# Altium PCB PhaseShifter.PcbDoc (part 1 of 2)
Units mil, origin at the board's own origin, x right, y up, seen from the top; angles counter-clockwise.
Board outline 3600.43 x 2703.44 mil, 4 copper layers (Top Layer, Layer 1, Layer 2, Bottom Layer), stack 62.449 mil thick; 81 components, 31 nets, 219 pads, 360 vias.
Unrouted connection lines stored in the file: 58.
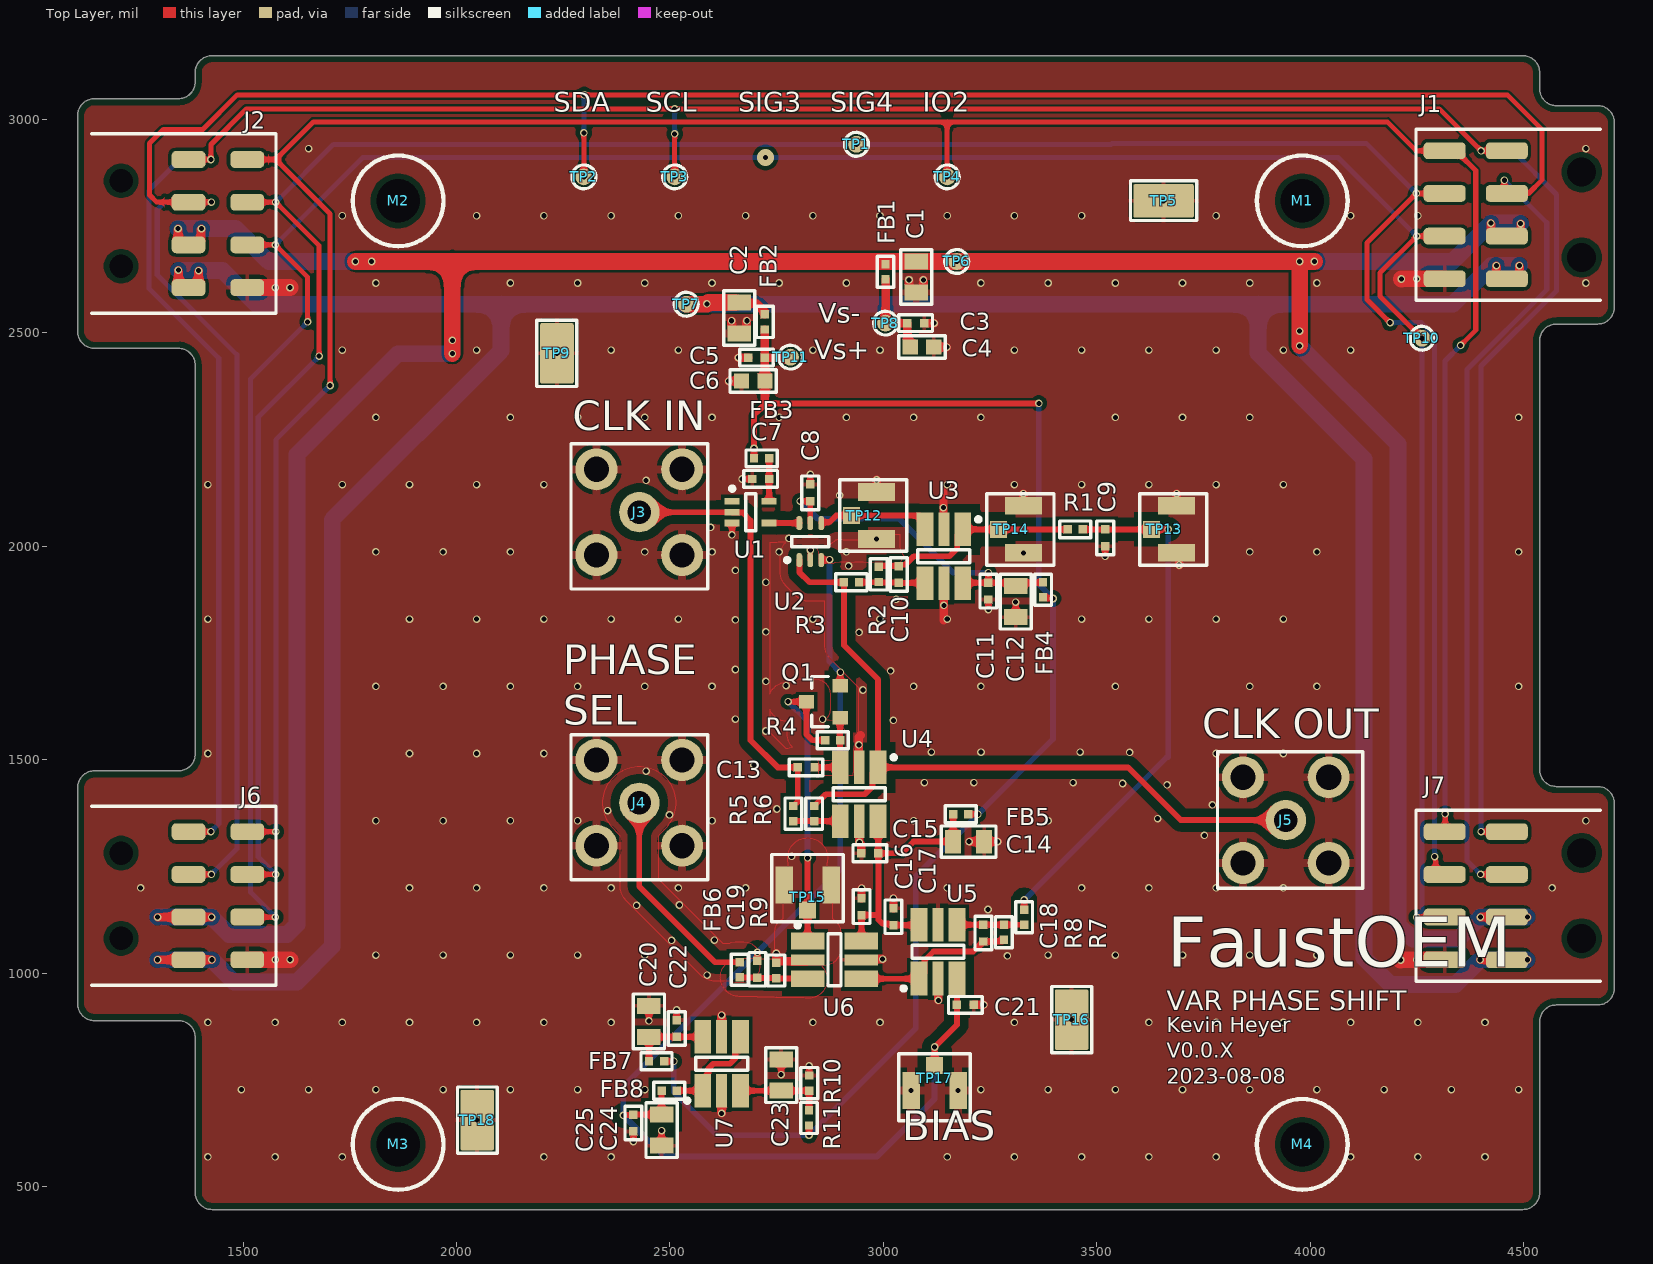
[diagram p0: Top Layer view]
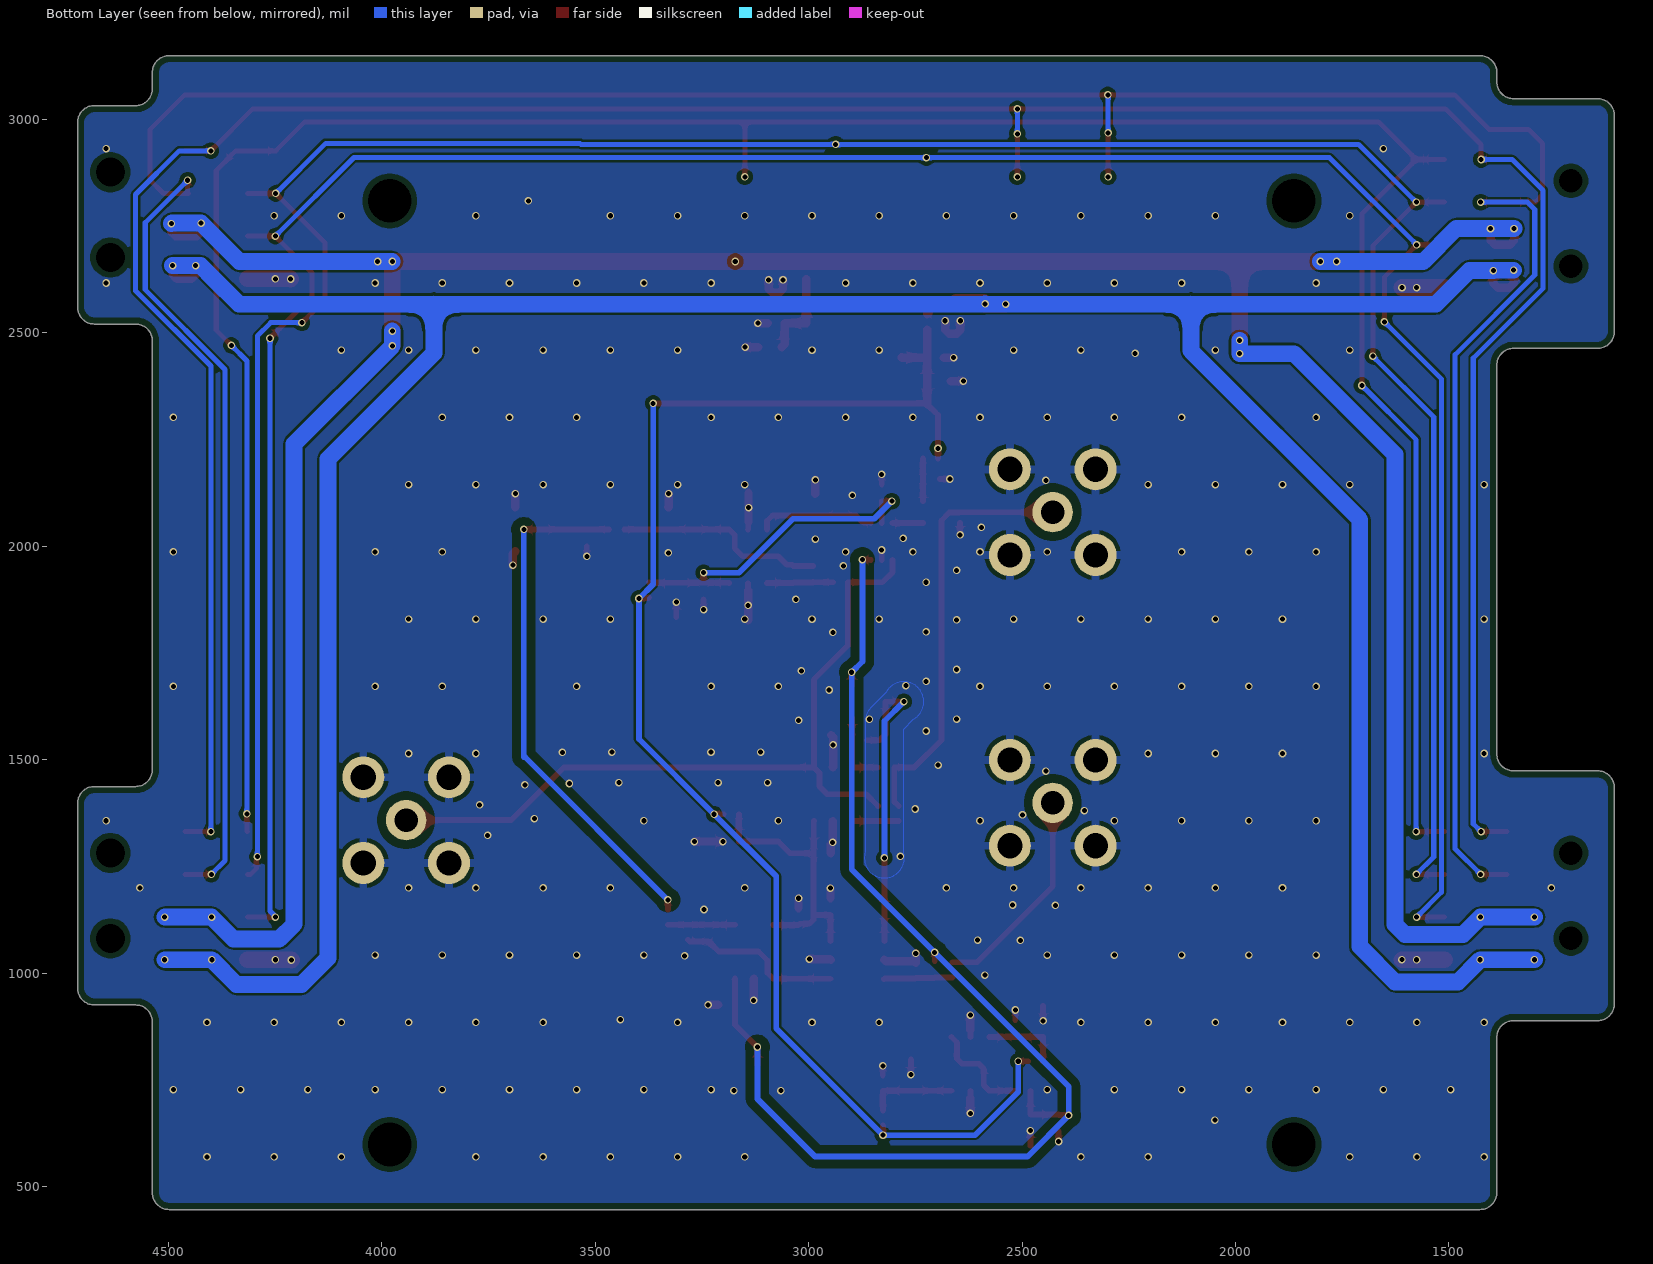
[diagram p1: Bottom Layer view, seen from below]
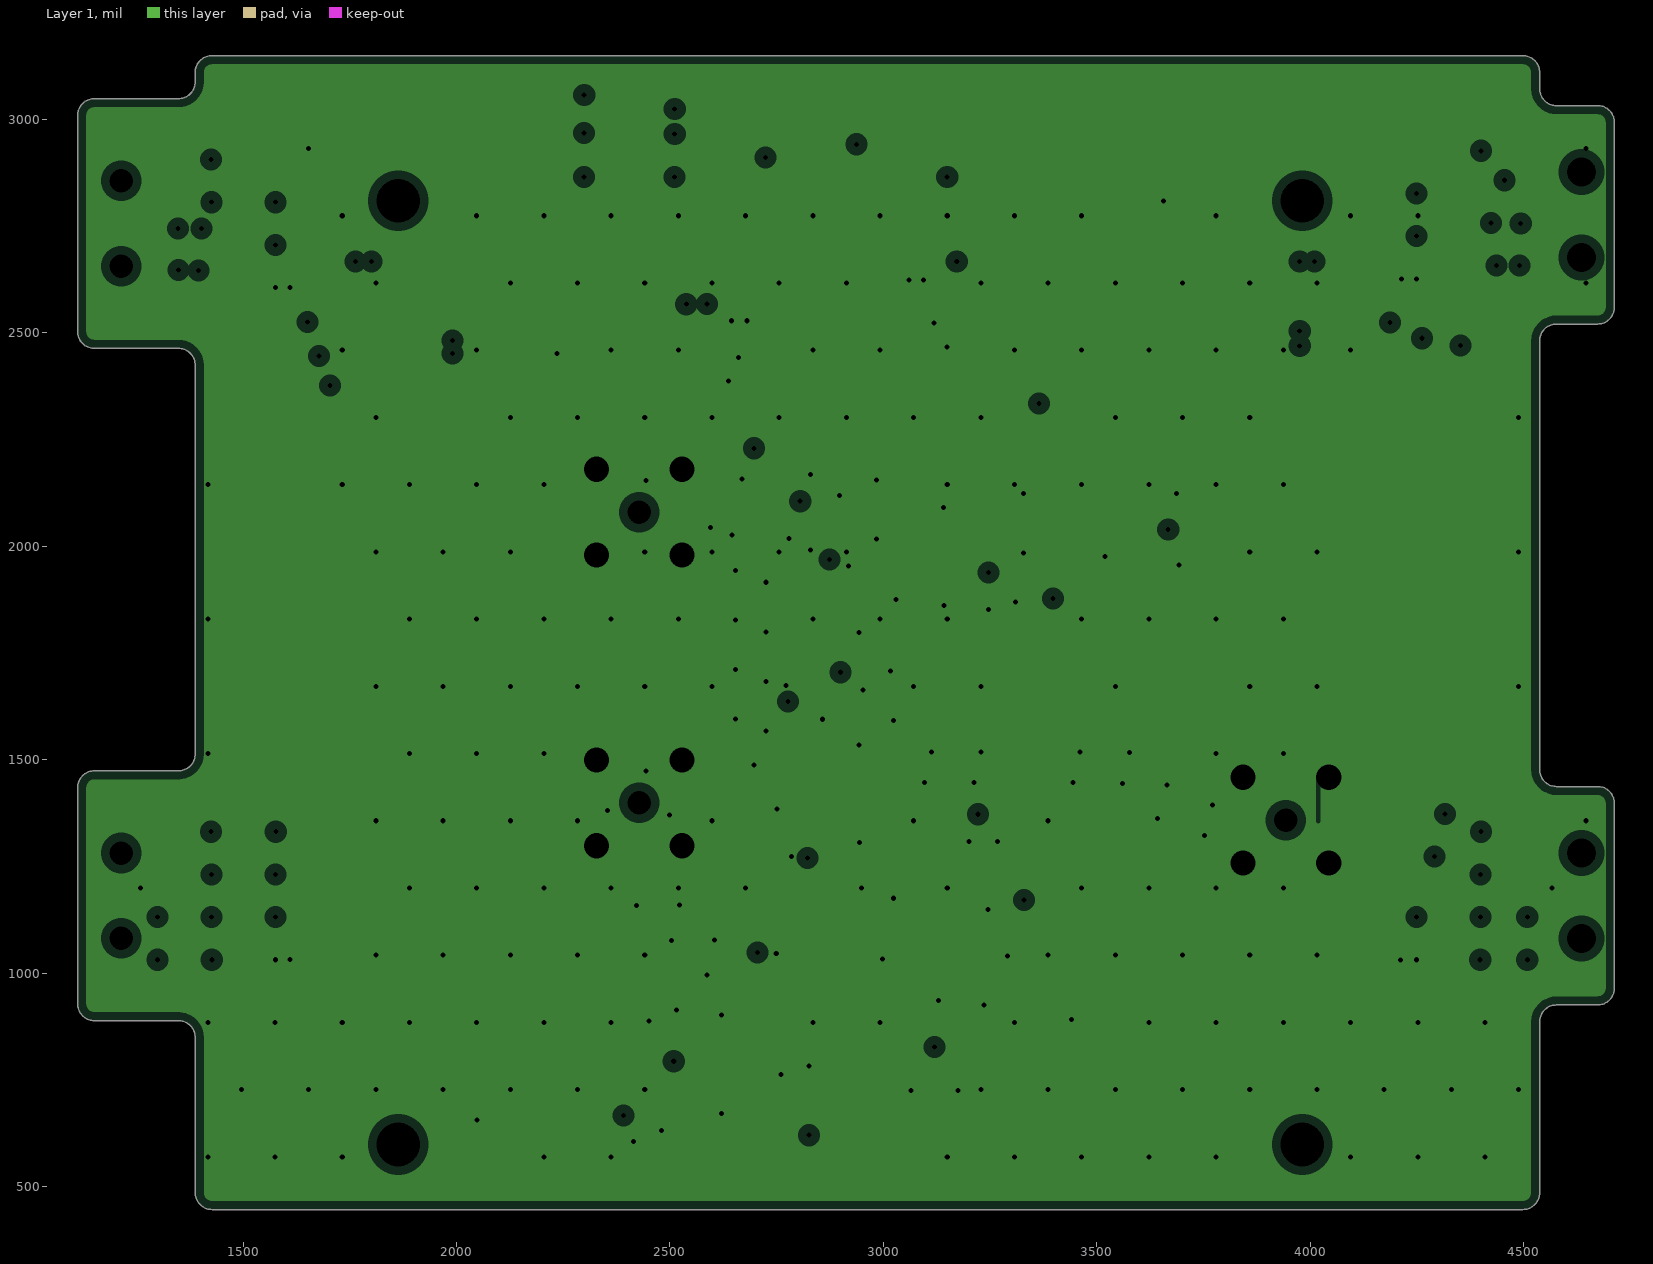
[diagram p2: Layer 1, clearances drawn from the general rule]
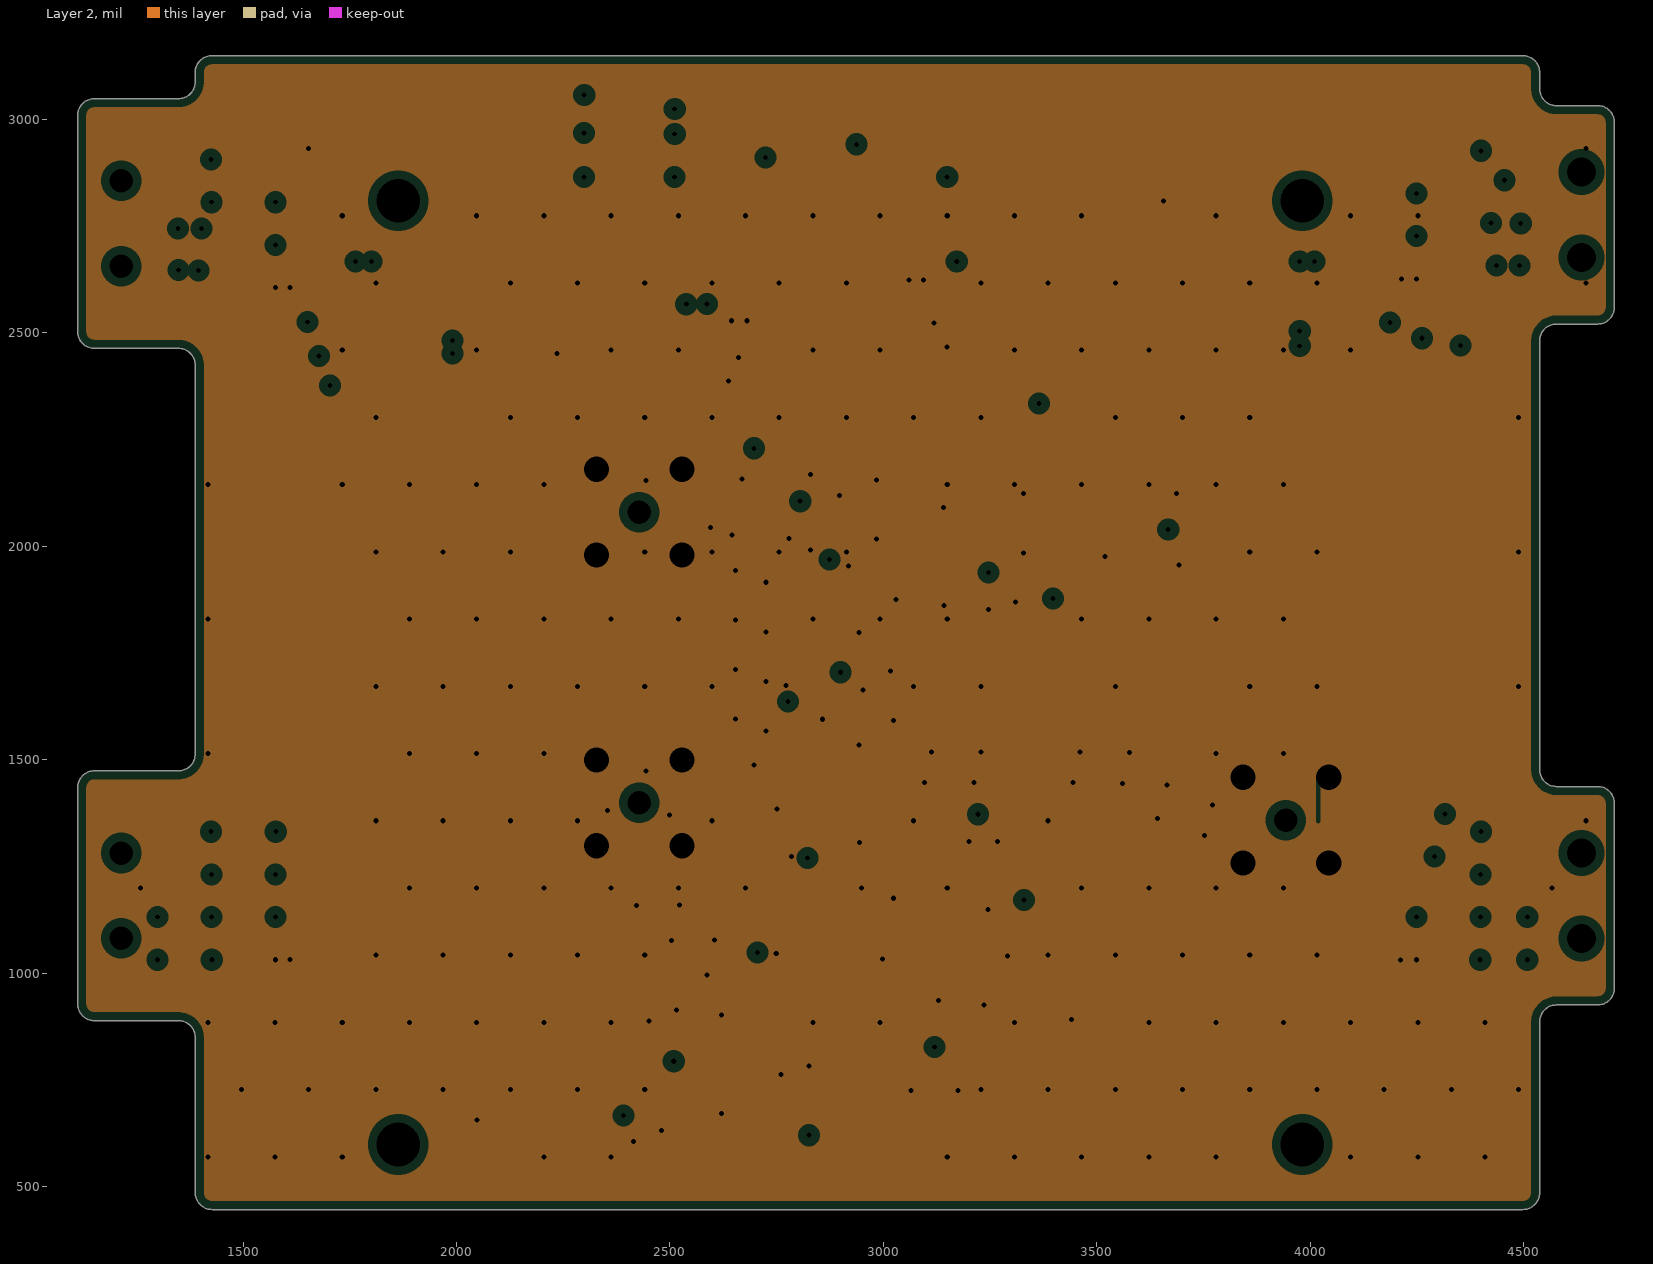
[diagram p3: Layer 2, clearances drawn from the general rule]
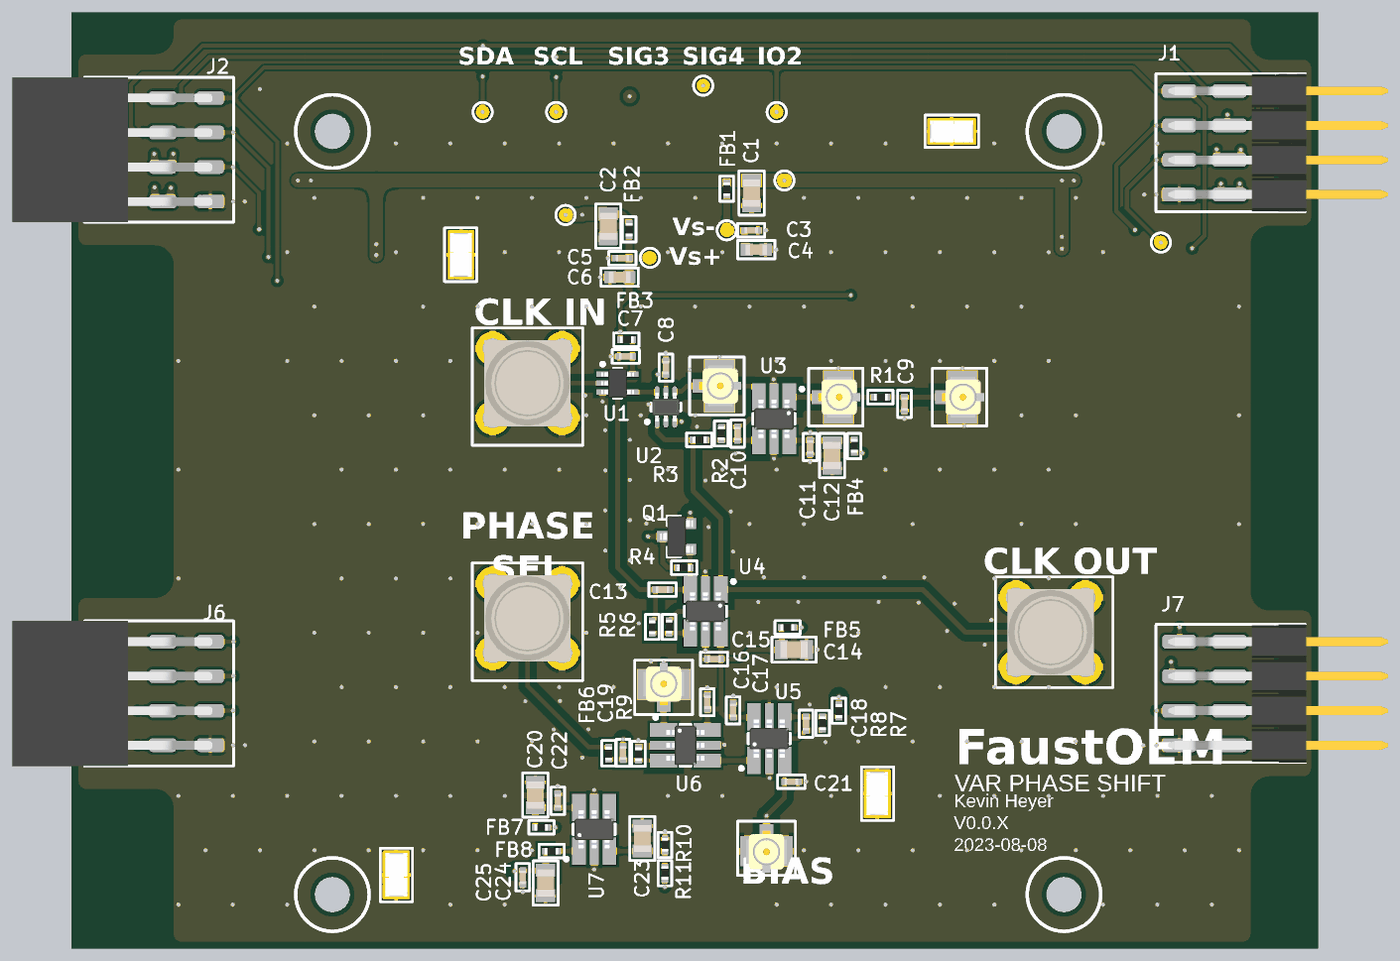
[diagram p4: 3D render of the assembled board from above, using the file's embedded part models]

## Layer stack, top to bottom
Top Solder: solder mask 0.7874, SM-001, Dk 3.8
Top Layer: signal copper 1.378
Dielectric 2: prepreg 8.2835, PP-006, Dk 4.6
Layer 1: plane copper 0.5984, net GND
Dielectric 1: dielectric 41.9291, FR-4, Dk 4.6
Layer 2: plane copper 0.5984, net GND
Dielectric 3: prepreg 8.2835, PP-006, Dk 4.6
Bottom Layer: signal copper 1.378
Bottom Solder: solder mask 0.7874, SM-001, Dk 3.8

## Board outline
1151.57,888.6 cw(c1151.57,927.97) 1112.2,927.97 1112.2,1434.24 cw(c1151.57,1434.24) 1151.57,1473.61 1348.43,1473.61 ccw(c1348.43,1512.98) 1387.8,1512.98 1387.8,2424.03 ccw(c1348.43,2424.03) 1348.43,2463.4 1151.57,2463.4 cw(c1151.57,2502.77) 1112.2,2502.77 1112.2,3009.04 cw(c1151.57,3009.04) 1151.57,3048.41 1348.43,3048.41 ccw(c1348.43,3087.78) 1387.8,3087.78 1387.8,3110 cw(c1427.17,3110) 1427.17,3149.37 4497.28,3149.37 4498.03,3149.37 cw(c4498.03,3110) 4537.4,3110 4537.4,3071.65 ccw(c4576.77,3071.65) 4576.77,3032.28 4673.26,3032.28 cw(c4673.26,2992.91) 4712.63,2992.91 4712.63,2559.84 cw(c4673.26,2559.84) 4673.26,2520.47 4576.77,2520.47 ccw(c4576.77,2481.1) 4537.4,2481.1 4537.4,1476.38 ccw(c4576.77,1476.38) 4576.77,1437.01 4673.26,1437.01 cw(c4673.26,1397.64) 4712.63,1397.64 4712.63,964.57 cw(c4673.26,964.57) 4673.26,925.2 4576.77,925.2 ccw(c4576.77,885.83) 4537.4,885.83 4537.4,485.3 cw(c4498.03,485.3) 4498.03,445.93 1427.17,445.93 cw(c1427.17,485.3) 1387.8,485.3 1387.8,849.23 ccw(c1348.43,849.22) 1348.43,888.6

## Design rules (kind name [scope] priority, off if disabled: settings)
BoardOutlineClearance BoardOutlineClearance_Part [InComponent('J3', 'J4','J5','J6')] p1: gap=0 ignorepadtopadclearanceinfootprint=FALSE
BoardOutlineClearance [OnCopper] p2: gap=15.75 ignorepadtopadclearanceinfootprint=FALSE except(0: Arc-SplitContinuation Track-SplitContinuation SMDPad-SplitContinuation THPad-SplitContinuation Via-SplitContinuation Fill-SplitContinuation Poly-SplitContinuation Region-SplitContinuation Text-SplitContinuation)
Clearance "Schematic Clearance Constraint" [InNetClass('HS_NET')] p1: gap=10 ignorepadtopadclearanceinfootprint=TRUE except(0: Arc-Hole Track-Hole SMDPad-Hole THPad-Hole Via-Hole Fill-Hole Poly-Hole Region-Hole Text-Hole; 20: Arc-Fill Arc-Poly Arc-Region Track-Fill Track-Poly Track-Region SMDPad-Fill SMDPad-Poly SMDPad-Region THPad-Fill THPad-Poly THPad-Region Via-Fill Via-Poly Via-Region Fill-Fill Fill-Poly Fill-Region Poly-Poly Poly-Region Region-Region)
Clearance "Schematic Clearance Constraint_1" [InNetClass('HS_NET') vs not InNetClass('HS_NET')] p2: gap=10 ignorepadtopadclearanceinfootprint=TRUE except(0: Arc-Hole Track-Hole SMDPad-Hole THPad-Hole Via-Hole Fill-Hole Poly-Hole Region-Hole Text-Hole; 20: Arc-Fill Arc-Poly Arc-Region Track-Fill Track-Poly Track-Region SMDPad-Fill SMDPad-Poly SMDPad-Region THPad-Fill THPad-Poly THPad-Region Via-Fill Via-Poly Via-Region Fill-Fill Fill-Poly Fill-Region Poly-Poly Poly-Region Region-Region)
Clearance Clearance_HS_PLANE [InNetClass('USB') vs IsCopperRegion and not InNet('4V0')] p3: gap=10 ignorepadtopadclearanceinfootprint=FALSE except(0: Arc-Hole Track-Hole SMDPad-Hole THPad-Hole Via-Hole Fill-Hole Poly-Hole Region-Hole Text-Hole; 3.54: Arc-Arc Arc-Track Track-Track; 4: Arc-SMDPad Track-SMDPad; 5: SMDPad-SMDPad; 7.87: SMDPad-Fill SMDPad-Poly SMDPad-Region Fill-Fill Fill-Poly Fill-Region Poly-Poly Poly-Region Region-Region; 12.99: Arc-THPad Track-THPad SMDPad-THPad; 19.68: Arc-Fill Arc-Poly Arc-Region Track-Fill Track-Poly Track-Region THPad-THPad THPad-Via THPad-Fill THPad-Poly THPad-Region THPad-Text Via-Via)
Clearance Clearance_BGA [InNetClass('BGA_FINE_PITCH') vs not IsThruPin] p4: gap=10 ignorepadtopadclearanceinfootprint=FALSE except(0: Arc-Hole Track-Hole SMDPad-Hole THPad-Hole Via-Hole Fill-Hole Poly-Hole Region-Hole Text-Hole; 3.54: Arc-Arc Arc-Track Track-Track; 4: Arc-SMDPad Track-SMDPad; 5: Arc-Fill Arc-Poly Arc-Region Track-Fill Track-Poly Track-Region SMDPad-SMDPad; 7.87: SMDPad-Fill SMDPad-Poly SMDPad-Region Fill-Fill Fill-Poly Fill-Region Poly-Poly Poly-Region Region-Region; 12.99: Arc-THPad Track-THPad SMDPad-THPad; 19.68: THPad-THPad THPad-Via THPad-Fill THPad-Poly THPad-Region THPad-Text Via-Via)
Clearance Clearance_TH [IsThruPin and InAnyNet] p5: gap=11.81 ignorepadtopadclearanceinfootprint=FALSE except(0: Arc-Hole Track-Hole SMDPad-Hole THPad-Hole Via-Hole Fill-Hole Poly-Hole Region-Hole Text-Hole; 3.54: Arc-Arc Arc-Track Track-Track; 5: Arc-SMDPad Track-SMDPad SMDPad-SMDPad; 10: Arc-Via Arc-Text Track-Via Track-Text SMDPad-Via SMDPad-Text Via-Text Fill-Text Poly-Text Region-Text Text-Text; 12.99: Arc-THPad Track-THPad SMDPad-THPad; 19.68: THPad-Via THPad-Text Via-Via)
Clearance [All] p6: gap=10 ignorepadtopadclearanceinfootprint=FALSE except(0: Arc-Hole Track-Hole SMDPad-Hole THPad-Hole Via-Hole Fill-Hole Poly-Hole Region-Hole Text-Hole; 5: Arc-SMDPad Arc-Fill Arc-Poly Arc-Region Track-SMDPad Track-Fill Track-Poly Track-Region SMDPad-SMDPad; 5.91: Arc-Arc Arc-Track Track-Track; 7.87: SMDPad-Fill SMDPad-Poly SMDPad-Region Fill-Fill Fill-Poly Fill-Region Poly-Poly Poly-Region Region-Region; 11.81: THPad-THPad; 12.2: THPad-Via; 12.6: THPad-Fill THPad-Poly THPad-Region; 12.99: THPad-Text; 19.68: Via-Via)
DiffPairsRouting [All] p1: maxlimit=5 minlimit=5 mostfreqgap=5 toplayer_minwidth=4 toplayer_maxwidth=5.78 toplayer_prefwidth=5.78 bottomlayer_minwidth=4 bottomlayer_maxwidth=5.78 bottomlayer_prefwidth=5.78 maxuncoupledlength=500
HoleSize [All] p1: absolutevalues=TRUE maxlimit=248.03 minlimit=11.81 maxpercent=80.000 minpercent=20.000
HoleToHoleClearance [All] p1: gap=3.94 allowstackedmicrovias=TRUE
MatchedLengths MatchLengths_xSignals_C7_U1A,U1B [InxSignalClass('xSignals_C7_U1A,U1B_MatchLengthsClass')] p1: tolerance=100 checknetsindiffpair=FALSE checkdiffpairvsdiffpair=TRUE checkxsignals=TRUE checkothers=TRUE
MatchedLengths MatchLengths_xSignals_J2_U5 [InxSignalClass('xSignals_J2_U5_MatchLengthsClass')] p2: tolerance=43.31 checknetsindiffpair=FALSE checkdiffpairvsdiffpair=TRUE checkxsignals=TRUE checkothers=TRUE
MatchedLengths MatchLengths_xSignals_U5_J2 [InxSignalClass('xSignals_U5_J2_MatchLengthsClass')] p3: tolerance=100 checknetsindiffpair=FALSE checkdiffpairvsdiffpair=TRUE checkxsignals=TRUE checkothers=TRUE
MaxMinImpedance "Schematic Impedance Constraint" [InNetClass('HS_NET')] p1: minimum=42.50 maximum=57.50
MaxMinImpedance "Schematic Impedance Constraint_1" [InNetClass('HS_NET')] p2: minimum=42.50 maximum=57.50
MinimumAnnularRing [All] p1: minimumring=2.95
PlaneClearance [All] p1: clearance=20
PlaneConnect [All] p1: pad.planeconnectstyle=Relief pad.reliefexpansion=20 pad.reliefentries=4 pad.reliefconductorwidth=10 pad.reliefairgap=10 via.planeconnectstyle=Direct via.reliefexpansion=20 via.reliefentries=4 via.reliefconductorwidth=10 via.reliefairgap=10
PolygonConnect [All] p1: thpad.connectstyle=Relief thpad.reliefconductorwidth=19.68 thpad.reliefentries=4 thpad.polygonreliefangle="90 Angle" thpad.airgapwidth=10 smdpad.connectstyle=Relief smdpad.reliefconductorwidth=10 smdpad.reliefentries=4 smdpad.polygonreliefangle="90 Angle" smdpad.airgapwidth=10 via.connectstyle=Direct via.reliefconductorwidth=10 via.reliefentries=4 via.polygonreliefangle="90 Angle" via.airgapwidth=10
RoomDefinition DemodQ [InComponentClass('DemodQ')] p1: confinementstyle=ConfineIn formatcopy=TRUE lockcomponents=FALSE outline 2255.91,594.01 3555.12,594.01 3555.12,2907.99 2255.91,2907.99
RoomDefinition PhaseShifter [InComponentClass('PhaseShifter')] p2: confinementstyle=ConfineIn formatcopy=TRUE lockcomponents=FALSE outline 893.7,476.89 4931.1,476.89 4931.1,2990.67 893.7,2990.67
RoutingVias [All] p1: holewidth=7.87 width=19.68 viastyle="Through Hole" minholewidth=7.87 minwidth=17.72 maxholewidth=15.75 maxwidth=31.5
SilkToSilkClearance [All] p1: silktosilkclearance=0
SilkToSolderMaskClearance [IsPad] p1: minsilkscreentomaskgap=0 clearancetoexposedcopper=TRUE
SolderMaskExpansion SolderMaskExpansion_VIa [isVia] p1: expansion=4 istentingtop=TRUE
SolderMaskExpansion [All] p2: expansion=1.97 istentingtop=FALSE
UnRoutedNet [All] p1: checkbadconnections=TRUE
Width Width_HS [InNetClass('HS_NET')] p1: maxlimit=13.59 minlimit=13.59 preferedwidth=13.59 impedanceprofiledriven=TRUE impedanceprofileid={1FF9B707-F771-4573-8292-77CF4BFD93AA} impedanceprofilevalue=50.000000 minimp=50.000000 maximp=50.000000 favimp=50.000000
Width [All] p2: maxlimit=39330.71 minlimit=5 preferedwidth=10
22 further rules are at their usual default settings.

## Classes and differential pairs
component class DemodQ: C7 C9 C11 C12 C21 C25 FB3 FB4 R1 R3 TP2 TP3 TP7 U2 U3
net class HS_NET: ALL+ ALL- CLOCK NetFB8_2 nSELECT OP- OP_OUT_ OSIG_I PHASE_DELAY PHASE_SHIFT SWITCH_OUT Vbias
component class PhaseShifter: C7 C9 C11 C12 C13 C14 C16 C18 C20 C21 C22 C24 C25 FB3 FB4 FB5 FB6 J1 J2 J3 J4 J7 M1 M2 M4 Q1 R4 R7 R9 R10 TP2 TP3 TP4 TP7 TP8 TP9 TP10 TP11 TP15 TP17 TP18 U5 U6 U7

## Components (designator, comment, footprint, x,y, rotation, side; value= is the part's Value field where it differs from the comment)
C1 "10uF" c0805 3076.94,2630.58 r90 top (schematic designator C21)
C2 "10uF" c0805 2662.04,2534.45 r90 top (schematic designator C14)
C3 "100nF" C0402 3075.79,2522.64 r180 top (schematic designator C26)
C4 "1uF" c0603 3090.55,2466.54 r180 top (schematic designator C27)
C5 "100nF" C0402 2702.76,2441.93 r0 top (schematic designator C13)
C6 "1uF" c0603 2694.88,2386.81 r0 top (schematic designator C12)
C7 "100nF" C0402 2712.6,2157.48 r180 top (schematic designator C2)
C8 "100nF" C0402 2828.74,2125 r90 top (schematic designator C1)
C9 "470nF" C0402 3519.68,2019.68 r90 top (schematic designator C3)
C10 "100pF" C0402 3036.09,1933.76 r270 top (schematic designator C6)
C11 "100nF" C0402 3246.06,1894.69 r270 top (schematic designator C5)
C12 "10uF" c0805 3310.04,1870.08 r90 top (schematic designator C4)
C13 "100pF" C0402 2818.94,1481.84 r180 top (schematic designator C7)
C14 "10uF" c0805 3199.8,1308.07 r180 top (schematic designator C16)
C15 "100nF" C0402 2968.17,1280.46 r180 top (schematic designator C19)
C16 "100nF" C0402 2948.82,1155.51 r90 top (schematic designator C17)
C17 "100nF" C0402 3023.62,1131.89 r90 top (schematic designator C18)
C18 "10nF" c0402 3234.25,1093.5 r90 top (schematic designator C22)
C19 "10nF" c0402 2704.72,1008.86 r90 top (schematic designator C20)
C20 "10uF" c0805 2450.79,886.81 r270 top (schematic designator C11)
C21 "10nF" c0402 3191.93,925.42 r180 top (schematic designator C23)
C22 "100nF" C0402 2515.75,870.08 r90 top (schematic designator C15)
C23 "10uF" c0805 2760.43,760.83 r270 top (schematic designator C8)
C24 "10uF" c0805 2480.32,631.89 r90 top (schematic designator C9)
C25 "100nF" C0402 2414.37,648.62 r270 top (schematic designator C10)
FB1 "68R" FB0402 3004.92,2642.72 r90 top (schematic designator FB4)
FB2 "68R" FB0402 2722.44,2525.34 r90 top (schematic designator FB3)
FB3 "68R" FB0402 2714.57,2205.71 r180 top (schematic designator FB1)
FB4 "68R" FB0402 3374.01,1897.64 r270 top (schematic designator FB2)
FB5 "68R" FB0402 3181.1,1372.05 r0 top (schematic designator FB7)
FB6 "68R" FB0402 2663.07,1007.78 r90 top (schematic designator FB8)
FB7 "68R" FB0402 2468.5,793.31 r0 top (schematic designator FB6)
FB8 "68R" FB0402 2498.03,724.41 r0 top (schematic designator FB5)
J1 "610108249121" "CONN HDR 08 MALE RA 2ROW - duplicate" 4387.83,2776.38 r270 top locked (schematic designator J5)
J2 "M22-6550442R" "CONN HDR 08 FEMALE RA 2ROW" 1437.01,2755.91 r90 top locked (schematic designator J9)
J3 "HJ-2LC15SF026" "SMA TH BORE" 2428.15,2079.72 r0 top (schematic designator J7)
J4 "HJ-2LC15SF026" "SMA TH BORE" 2428.15,1398.62 r0 top (schematic designator J6)
J5 "HJ-2LC15SF026" "SMA TH BORE" 3942.91,1358.27 r90 top (schematic designator J1)
J6 "M22-6550442R" "CONN HDR 08 FEMALE RA 2ROW" 1437.01,1181.1 r90 top locked (schematic designator J11)
J7 "610108249121" "CONN HDR 08 MALE RA 2ROW - duplicate" 4387.83,1181.1 r270 top locked (schematic designator J10)
M1 "M2.0" "MECH M2.0 UNPLATED" 3981.3,2809.06 r0 top
M2 "M2.0" "MECH M2.0 UNPLATED" 1863.19,2809.06 r0 top (schematic designator M3)
M3 "M2.0" "MECH M2.0 UNPLATED" 1863.19,598.43 r0 top (schematic designator M2)
M4 "M2.0" "MECH M2.0 UNPLATED" 3981.3,598.43 r0 top
Q1 "MMBFJ309LT1G" "SOT 23-3" 2859.61,1635.77 r180 top
R1 "100R" R0402 3450.79,2039.37 r180 top
R2 "200R" R0402 2989.17,1934.75 r270 top (schematic designator R3)
R3 "100R" R0402 2926.18,1915.36 r180 top (schematic designator R2)
R4 "1M00" r0402 2880.57,1545.53 r0 top (schematic designator R8)
R5 "100R" R0402 2789.03,1372.58 r90 top (schematic designator R4)
R6 "100R" R0402 2837.69,1374.56 r270 top (schematic designator R7)
R7 "1k00" R0402 3329.73,1129.92 r90 top (schematic designator R9)
R8 "5k10" R0402 3282.48,1094.49 r90 top (schematic designator R10)
R9 "5k10" R0402 2749.02,1004.92 r90 top (schematic designator R11)
R10 "1k00" R0402 2826.15,743.12 r270 top (schematic designator R6)
R11 "1k00" R0402 2825.78,661.42 r270 top (schematic designator R5)
TP1 "1mm" TESTPOINT_SMT 2936.76,2941.53 r90 top (schematic designator TP13)
TP2 "1mm" TESTPOINT_SMT 2298.23,2865.16 r90 top (schematic designator TP14)
TP3 "1mm" TESTPOINT_SMT 2511.07,2865.16 r90 top (schematic designator TP1)
TP4 "1mm" TESTPOINT_SMT 3149.61,2865.16 r90 top (schematic designator TP16)
TP5 "CLIP" TESTPOINT_CLIP_1206 3656.5,2809.06 r0 top (schematic designator TP25)
TP6 "1mm" TESTPOINT_SMT 3171.84,2667 r90 top (schematic designator TP19)
TP7 "1mm" TESTPOINT_SMT 2538.22,2566.93 r90 top (schematic designator TP12)
TP8 "1mm" TESTPOINT_SMT 3004.92,2522.64 r90 top (schematic designator TP20)
TP9 "CLIP" TESTPOINT_CLIP_1206 2235.24,2451.77 r90 top (schematic designator TP18)
TP10 "1mm" TESTPOINT_SMT 4261.81,2487.2 r270 top (schematic designator TP17)
TP11 "1mm" TESTPOINT_SMT 2782.48,2442.91 r0 top (schematic designator TP8)
TP12 "U.FL" U.FL 2984.25,2071.85 r270 top (schematic designator TP2)
TP13 "U.FL" U.FL 3687,2039.37 r270 top (schematic designator TP4)
TP14 "U.FL" U.FL 3328.74,2039.37 r270 top (schematic designator TP3)
TP15 "U.FL" U.FL 2822.47,1206.69 r0 top (schematic designator TP5)
TP16 "CLIP" TESTPOINT_CLIP_1206 3440.94,890.75 r270 top (schematic designator TP21)
TP17 "U.FL" U.FL 3120.08,724.41 r180 top (schematic designator TP6)
TP18 "CLIP" TESTPOINT_CLIP_1206 2048.23,655.51 r270 top (schematic designator TP24)
U1 "74LVC1G14SE-7" "SC70 5pin TI DCK" 2688.97,2079.72 r0 top (schematic designator U2)
U2 "SN74LVC1G3157DCKR" SC70-6 2828.74,2010.83 r90 top (schematic designator U1)
U3 "SOT5/6-23 GENERIC" SOT23-5/6_Modified 3141.73,1976.38 r270 top
U4 "SOT5/6-23 GENERIC" SOT23-5/6_Modified 2943.4,1418.85 r270 top (schematic designator U5)
U5 "SOT5/6-23 GENERIC" SOT23-5/6_Modified 3127.95,1050.2 r90 top (schematic designator U7)
U6 "SOT5/6-23 GENERIC" SOT23-5/6_Modified 2885.46,1030.91 r0 top
U7 "SOT5/6-23 GENERIC" SOT23-5/6_Modified 2621.06,787.4 r90 top (schematic designator U4)

## Footprints (in the part's own frame and the unit in brackets; to place one, negate y for a bottom-side part, rotate by r counter-clockwise, add the part's x,y. Pads: shape width x height; smd on the part's side, far side on the other; paste and mask are expansions set on the pad)
C0402 [mm]
  rect 0.5x0.5 smd: 1(-0.5,0) 2(0.5,0)
  silkscreen extent -1,-0.5 1,0.5, body extent -0.5,-0.25 0.5,0.25, height 0.51
c0402 [mm]
  rect 0.5x0.5 smd: 1(-0.5,0) 2(0.5,0)
  silkscreen extent -1,-0.5 1,0.5, body extent -0.5,-0.25 0.5,0.25, height 0.51
c0603 [mm]
  rect 0.9x0.9 smd: 1(-0.7,0) 2(0.7,0)
  silkscreen extent -1.38,-0.67 1.37,0.67, body extent -0.8,-0.4 0.8,0.4, height 0.81
c0805 [mm]
  rect 0.95x1.4 smd: 1(-0.925,0) 2(0.925,0)
  silkscreen extent -1.62,-0.92 1.63,0.93, body extent -1,-0.62 1,0.63, height 0.61
"CONN HDR 08 FEMALE RA 2ROW" [mm]
  round 0 hole 1.4 unplated: 0(-2.54,5.659) 0(2.54,5.659)
  rrect50% 1x2 smd: 1(3.81,1.649) 2(1.27,1.649) 3(-1.27,1.649) 4(-3.81,1.649) 5(3.81,-1.849) 6(1.27,-1.849) 7(-1.27,-1.849) 8(-3.81,-1.849)
  silkscreen extent -5.33,-3.56 5.33,7.41, body extent -5.33,-2 5.33,12.69, height 5.01
"CONN HDR 08 MALE RA 2ROW - duplicate" [mm]
  round 0 hole 1.73 unplated: 0(-2.54,6.299) 0(2.54,6.299)
  rrect50% 1x2.5 smd: 1(-3.81,1.849) 2(-1.27,1.849) 3(1.27,1.849) 4(3.81,1.849) 5(-3.81,-1.849) 6(-1.27,-1.849) 7(1.27,-1.849) 8(3.81,-1.849)
  silkscreen extent -5.08,-3.56 5.08,7.41, body extent -5.08,-2.67 5.08,13.49, height 5.09
FB0402 [mm]
  rect 0.5x0.5 smd: 1(-0.45,0) 2(0.45,0)
  silkscreen extent -0.92,-0.5 0.93,0.5, body extent -0.53,-0.25 0.47,0.25, height 0.36
"MECH M2.0 UNPLATED" [mm]
  round 0 hole 2.6 unplated: 1(0,0)
  silkscreen extent -2.7,-2.7 2.7,2.7
R0402 [mm]
  rect 0.5x0.5 smd: 1(-0.425,0) 2(0.475,0)
  silkscreen extent -0.9,-0.5 0.95,0.5, body extent -0.5,-0.25 0.5,0.25, height 0.36
r0402 [mm]
  rect 0.5x0.5 smd: 1(-0.425,0) 2(0.475,0)
  silkscreen extent -0.9,-0.5 0.95,0.5, body extent -0.5,-0.25 0.5,0.25, height 0.36
"SC70 5pin TI DCK" [mm]
  rect 0.9x0.4 smd: 1(-1.1,0.65) 2(-1.1,0) 3(-1.1,-0.65) 4(1.1,-0.65) 5(1.1,0.65)
  silkscreen extent -1.22,-1.1 0.3,1.52, body extent -1.2,-1.07 1.2,1.07, height 1.1
SC70-6 [mm] "TSOP, 6-Leads, Body 2.00x1.25mm, Pitch 0.65mm, IPC Medium Density"
  oval 0.85x0.35 smd: 1(-1.1,0.65) 2(-1.1,0) 3(-1.1,-0.65) 4(1.1,-0.65) 5(1.1,0) 6(1.1,0.65)
  silkscreen extent -1.22,-1.1 0.3,1.5, body extent -1.05,-1 1.05,1, height 1
"SMA TH BORE" [mm]
  round 2.5 hole 1.5: 0(-2.55,-2.55) 0(-2.55,2.55) 0(2.55,-2.55) 0(2.55,2.55)
  round 2.4 hole 1.4: 1(0,0)
  silkscreen extent -4.06,-4.57 4.06,4.06, body extent -3.17,-3.17 3.17,3.17, height 9.55
SOT23-5/6_Modified [mm] "SOT23, 6-Leads, Body 2.90x2.80mm, Pitch 0.95mm, IPC Low Density"
  rect 2x1 smd: 1(-1.6,1.125) 3(-1.6,-1.125) 4(1.6,-1.125) 6(1.6,1.125)
  rect 2x0.65 smd: 2(-1.6,0) 5(1.6,0)
  silkscreen extent -2.32,-1.55 0.39,2.18, body extent -1.4,-1.45 1.4,1.45, height 1.45
"SOT 23-3" [mm]
  rect 0.9x0.8 smd: 1(-1,0.95) 2(-1,-0.95) 3(1,0)
  silkscreen extent -0.3,-1.5 0.7,1.5, body extent -1.2,-1.5 1.2,1.5, height 1.15
TESTPOINT_CLIP_1206 [mm]
  rrect10% 3.6x2 smd paste-1111: 1(0,0)
  silkscreen extent -1.97,-1.17 1.97,1.2, body extent -1.6,-0.8 1.6,0.8, height 2.01
TESTPOINT_SMT [mm] "testpoint smt"
  round 1 smd paste-1111: 1(0,0)
  silkscreen extent -0.71,-0.71 0.71,0.71
U.FL [mm] "SOT23, 6-Leads, Body 2.90x2.80mm, Pitch 0.95mm, IPC Low Density"
  rect 1.05x2.2 smd: 0(-1.4,0) 0(1.4,0)
  rect 1x1 smd: 1(0,-1.5)
  silkscreen extent -2.13,-2.2 2.13,1.8, body extent -1.5,-1.5 1.5,1.6, height 1.26

## Part data
C1 C2 C12 C14 C20 C23 C24: library part "CAP CER 10uF 25V X5R 0805", "Cap Ceramic 10uF 25V X5R 10% SMD 0805 85°C Embossed T/R", Case Code (Imperial)=0805, Case Code (Metric)=2012, Dielectric=X5R, Manufacturer=Samsung, Manufacturer Part Number=CL21A106KAYNNNE, Max Operating Temperature=85°C, Min Operating Temperature=-55°C, Package Quantity=1, Supplier Part Number 1=1276-2891-2-ND, Tolerance=10%, Voltage Rating=25V, Capacitance=10uF, Case/Package=0805, Category="Ceramic Capacitors", ComponentLink1Description=https://datasheet.ciiva.com/25796/cl21a106kaynnne-25796720.pdf?src-supplier=Digi-Key, ComponentLink1URL=https://datasheet.ciiva.com/25796/cl21a106kaynnne-25796720.pdf?src-supplier=Digi-Key, ComponentLink2Description=https://datasheet.ciiva.com/26838/getdatasheetpartid-357558-26838583.pdf?src-supplier=Verical, ComponentLink2URL=https://datasheet.ciiva.com/26838/getdatasheetpartid-357558-26838583.pdf?src-supplier=Verical, Construction=Flat, Depth=1.25mm, Height=1.25mm, Length=2mm, Mount="Surface Mount", Packaging="Tape and Reel", Pricing 1="2000=0.03549, 4000=0.03247 (USD)", Radiation Hardening=No, RoHS=Yes, RoHS Compliant=Yes, Series=CL, Stock 1=2266338, Supplier 1=Digi-Key, Thickness=0.057inch, Width=0.049inch
C3 C5 C7 C8 C11 C15 C16 C17 C22 C25: library part "CAP CER 100nF 25V X5R 0402", "Cap Ceramic 0.1uF 25V X5R 10% Pad SMD 0402 85¡ãC T/R / Multi Layer Ceramic Capacitor (MLCC)", Case Code (Imperial)=0402, Case Code (Metric)=1005, Dielectric=X5R, Manufacturer=Samsung, Manufacturer Part Number=CL05A104KA5NNNC, Max Operating Temperature=85°C, Min Operating Temperature=-55°C, Package Quantity=1, Supplier Part Number 1=1276-1043-1-ND, Tolerance=10%, Voltage=25V, Capacitance=100nF, Case/Package=0402, Category="Ceramic Capacitors", ComponentLink1Description=https://datasheet.ciiva.com/25802/cl05a104ka5nnnc-25802704.pdf?src-supplier=Digi-Key, ComponentLink1URL=https://datasheet.ciiva.com/25802/cl05a104ka5nnnc-25802704.pdf?src-supplier=Digi-Key, ComponentLink2Description=https://datasheet.ciiva.com/26838/getdatasheetpartid-357412-26838142.pdf?src-supplier=Verical, ComponentLink2URL=https://datasheet.ciiva.com/26838/getdatasheetpartid-357412-26838142.pdf?src-supplier=Verical, ComponentLink3Description=https://datasheet.ciiva.com/16437/cl05a104ka5nnnc-16437369.pdf?src-supplier=Future+Electronics, ComponentLink3URL=https://datasheet.ciiva.com/16437/cl05a104ka5nnnc-16437369.pdf?src-supplier=Future+Electronics, ComponentLink4Description=https://datasheet.ciiva.com/26309/mlcc-catalogdownload2013-eng-26309014.pdf?src-supplier=Distrelec, ComponentLink4URL=https://datasheet.ciiva.com/26309/mlcc-catalogdownload2013-eng-26309014.pdf?src-supplier=Distrelec, Construction=Flat, Depth=0.5mm, Height=0.5mm, Lead Free="Lead Free", Length=1mm, Mount="Surface Mount", Packaging="Tape and Reel", Pricing 1="1=0.10000, 10=0.01100, 50=0.00600, 100=0.00490, 500=0.00346, 1000=0.00272, 2500=0.00248, 5000=0.00228 (USD)", Radiation Hardening=No, RoHS=Yes, Series=CL, Stock 1=8053194, Supplier 1=Digi-Key, Thickness=0.022inch, Voltage Rating=25V, Voltage Rating (DC)=25V, Width=0.02inch
C4 C6: library part "CAP CER 1uF 50V X5R 0603", "Multilayer Ceramic Capacitors (High dielectric type), 50V, 1 uF, ± 10 %, 0603, X5R, RoHS", Case Code (Imperial)=0603, Case Code (Metric)=1608, Dielectric=X5R, Manufacturer="Taiyo Yuden", Manufacturer Part Number=UMK107BJ105KA-T, Max Operating Temperature=85°C, Min Operating Temperature=-55°C, Package Quantity=1, Supplier Part Number 1=587-2400-1-ND, Tolerance=10%, Voltage Rating=50V, Capacitance=1uF, Case/Package=0603, Category="Ceramic Capacitors", ComponentLink1Description=https://datasheet.ciiva.com/134/umk107bj105ka-t-ss-134740.pdf?src-supplier=Digi-Key, ComponentLink1URL=https://datasheet.ciiva.com/134/umk107bj105ka-t-ss-134740.pdf?src-supplier=Digi-Key, ComponentLink2Description=https://datasheet.ciiva.com/11601/umk107bj105ka-t-ss-11601811.pdf?src-supplier=Avnet, ComponentLink2URL=https://datasheet.ciiva.com/11601/umk107bj105ka-t-ss-11601811.pdf?src-supplier=Avnet, ComponentLink3Description=https://datasheet.ciiva.com/5744/1697715-5744913.pdf?src-supplier=Farnell, ComponentLink3URL=https://datasheet.ciiva.com/5744/1697715-5744913.pdf?src-supplier=Farnell, ComponentLink4Description=https://datasheet.ciiva.com/30199/43umk107bj105ka-t-30199791.pdf?src-supplier=Onlinecomponents.com, ComponentLink4URL=https://datasheet.ciiva.com/30199/43umk107bj105ka-t-30199791.pdf?src-supplier=Onlinecomponents.com, ComponentLink5Description=https://datasheet.ciiva.com/15922/336umk107bj105ka-t-15922611.pdf?src-supplier=Onlinecomponents.com, ComponentLink5URL=https://datasheet.ciiva.com/15922/336umk107bj105ka-t-15922611.pdf?src-supplier=Onlinecomponents.com, ComponentLink6Description=https://datasheet.ciiva.com/5427/mlcc-all-e-541559-5427036.pdf?src-supplier=Mouser, ComponentLink6URL=https://datasheet.ciiva.com/5427/mlcc-all-e-541559-5427036.pdf?src-supplier=Mouser, ComponentLink7Description=https://datasheet.ciiva.com/7975/mlcc-all-e-7975898.pdf?src-supplier=Element14, ComponentLink7URL=https://datasheet.ciiva.com/7975/mlcc-all-e-7975898.pdf?src-supplier=Element14, ComponentLink8Description=https://datasheet.ciiva.com/7975/1697715-7975608.pdf?src-supplier=Element14, ComponentLink8URL=https://datasheet.ciiva.com/7975/1697715-7975608.pdf?src-supplier=Element14, ComponentLink9Description=https://datasheet.ciiva.com/22694/1697715-22694278.pdf?src-supplier=Element14, ComponentLink9URL=https://datasheet.ciiva.com/22694/1697715-22694278.pdf?src-supplier=Element14, Construction=Flat, Contact Plating=Nickel, Depth=0.8mm, Halogen Free="Halogen Free", Height=0.8mm, Length=1.6mm, Mount="Surface Mount", Number of Pins=2, Packaging="Tape and Reel", Pricing 1="1=0.19000, 10=0.12900, 50=0.07760, 100=0.06560, 500=0.04484, 1000=0.03968 (USD)", Radiation Hardening=No, REACH SVHC=Unknown, RoHS=Yes, RoHS Compliant=Yes, Series=M, Stock 1=955108, Supplier 1=Digi-Key, Termination=SMD/SMT, Thickness=0.035inch, Voltage Rating (DC)=50V, Width=0.031inch
C9: library part "CAP CER 470nF 10V X7R 0402", "Multilayer Ceramic Capacitor, 0.47 uF, 50 V, ± 2%, C0G (NP0), 0402 [1005 Metric]", Case/Package=0402, Dielectric=X7R, Manufacturer 1=Yageo, Manufacturer Part Number 1=CC0402KRX7R6BB474, Max Operating Temperature=125°C, Min Operating Temperature=-55°C, Supplier Part Number 1=09AK0987, Tolerance=10%, Voltage Rating=10V, Category 1="Ceramic Capacitors", ComponentLink1Description=http://www.yageo.com/documents/recent/UPY-GPHC_X7R_6.3V-to-50V_18.pdf?src-supplier=Digi-Key, ComponentLink1URL=http://www.yageo.com/documents/recent/UPY-GPHC_X7R_6.3V-to-50V_18.pdf?src-supplier=Digi-Key, ComponentLink2Description=https://datasheet.octopart.com/CC0402KRX7R6BB474-Yageo-datasheet-151948686.pdf?src-supplier=Farnell, ComponentLink2URL=https://datasheet.octopart.com/CC0402KRX7R6BB474-Yageo-datasheet-151948686.pdf?src-supplier=Farnell, ComponentLink3Description=https://datasheet.octopart.com/CC0402KRX7R6BB474-Yageo-datasheet-166511530.pdf?src-supplier=Future+Electronics, ComponentLink3URL=https://datasheet.octopart.com/CC0402KRX7R6BB474-Yageo-datasheet-166511530.pdf?src-supplier=Future+Electronics, Description 1="Multilayer Ceramic Capacitor, 0.47 uF, 50 V, ± 2%, C0G (NP0), 0402 [1005 Metric]", Halogen Free="Halogen Free", Lead Free="Lead Free", Length=0.039inch, Mounting Technology="Surface Mount", Packaging="Tape and Reel", Pricing 1="1=0.238, 10=0.142 (USD)", RoHS 1=Yes, RoHS Compliant=Yes, Series=CC, Stock 1=9400, Supplier 1=Newark, Thickness=0.022inch, Voltage Rating (DC)=10V, Width=0.02inch
C10 C13: library part "CAP CER 100pF 50V C0G 0402", "0402 100 pF 50 V ±5% Tolerance NP0/C0G Multilayer Ceramic Chip Capacitor", Case Code (Imperial)=0402, Case Code (Metric)=1005, Dielectric=C0G, Manufacturer=Yageo, Manufacturer Part Number=CC0402JPNPO9BN101, Max Operating Temperature=125°C, Min Operating Temperature=-55°C, Resistor Type=Ceramic, Supplier Part Number 1=13-CC0402JPNPO9BN101CT-ND, Tolerance=5%, Voltage Rating (DC)=50V, Capacitance=100pF, Case/Package=0402, Category="Ceramic Capacitors", ComponentLink1Description=http://www.mouser.com/ds/2/447/Yageo_UPY-GP_NP0_16V-to-50V_9-358835.pdf?src-supplier=Mouser, ComponentLink1URL=http://www.mouser.com/ds/2/447/Yageo_UPY-GP_NP0_16V-to-50V_9-358835.pdf?src-supplier=Mouser, ComponentLink2Description=http://components.arrow.com/part/dataview/0323_04038301?src-supplier=Arrow+Europe, ComponentLink2URL=http://components.arrow.com/part/dataview/0323_04038301?src-supplier=Arrow+Europe, Depth=0.5mm, Length=1mm, Packaging="Tape and Reel", Pricing 1="1=0.10000, 10=0.01900, 50=0.01040, 100=0.00850, 500=0.00604, 1000=0.00475, 2500=0.00432, 5000=0.00397 (USD)", RoHS=Yes, RoHS Compliant=Yes, Stock 1=83787, Supplier 1=Digi-Key, Termination=SMD/SMT, Weight=2.3E-05oz, Width=0.5mm
C18 C19 C21: library part "CAP CER 10nF 16V Y5V 0402", "0402 10 nF 16 V -20 / +80 % Tolerance Y5V SMT Multilayer Ceramic Capacitor", Case Code (Imperial)=0402, Case Code (Metric)=1005, Dielectric=Y5V, Dielectric Material=Ceramic, Insulation Resistance=100GR, Manufacturer=Yageo, Manufacturer Part Number=CC0402ZRY5V7BB103, Max Operating Temperature=85°C, Min Operating Temperature=-55°C, Package Quantity=10000, Supplier Part Number 1=1300987, Tolerance=80%, Voltage Rating=16V, Capacitance=10nF, Case/Package=0402, Category="Ceramic Capacitors", ComponentLink1Description=https://datasheet.ciiva.com/144/mlccorderingcode-144484.pdf?src-supplier=Digi-Key, ComponentLink1URL=https://datasheet.ciiva.com/144/mlccorderingcode-144484.pdf?src-supplier=Digi-Key, ComponentLink2Description=https://datasheet.ciiva.com/144/mlccorderingcode-144485.pdf?src-supplier=Digi-Key, ComponentLink2URL=https://datasheet.ciiva.com/144/mlccorderingcode-144485.pdf?src-supplier=Digi-Key, ComponentLink3Description=https://datasheet.ciiva.com/144/mlccorderingcode-144486.pdf?src-supplier=Digi-Key, ComponentLink3URL=https://datasheet.ciiva.com/144/mlccorderingcode-144486.pdf?src-supplier=Digi-Key, ComponentLink4Description=https://datasheet.ciiva.com/11586/upy-gphc-y5v-6-3v-to-50v-5-11586517.pdf?src-supplier=Avnet, ComponentLink4URL=https://datasheet.ciiva.com/11586/upy-gphc-y5v-6-3v-to-50v-5-11586517.pdf?src-supplier=Avnet, ComponentLink5Description=https://datasheet.ciiva.com/5789/1132289-5789565.pdf?src-supplier=Farnell, ComponentLink5URL=https://datasheet.ciiva.com/5789/1132289-5789565.pdf?src-supplier=Farnell, ComponentLink6Description=https://datasheet.ciiva.com/5789/1132289-5789566.pdf?src-supplier=Farnell, ComponentLink6URL=https://datasheet.ciiva.com/5789/1132289-5789566.pdf?src-supplier=Farnell, ComponentLink7Description=https://datasheet.ciiva.com/17437/upy-gphc-y5v-6-3v-to-50v-5-17437221.pdf?src-supplier=Avnet+Europe, ComponentLink7URL=https://datasheet.ciiva.com/17437/upy-gphc-y5v-6-3v-to-50v-5-17437221.pdf?src-supplier=Avnet+Europe, ComponentLink8Description=https://datasheet.ciiva.com/8033/1132289-8033641.pdf?src-supplier=Element14, ComponentLink8URL=https://datasheet.ciiva.com/8033/1132289-8033641.pdf?src-supplier=Element14, ComponentLink9Description=https://datasheet.ciiva.com/8033/1132289-8033642.pdf?src-supplier=Element14, ComponentLink9URL=https://datasheet.ciiva.com/8033/1132289-8033642.pdf?src-supplier=Element14, Construction=Flat, Depth=0.5mm, Halogen Free="Halogen Free", Height=0.5mm, Lead Free="Lead Free", Length=1mm, Mount="Surface Mount", Number of Pins=2, Packaging="Tape and Reel", Pricing 1="10000=0.00340, 30000=0.00320, 100000=0.00300, 200000=0.00290, 400000=0.00270 (USD)", Radiation Hardening=No, REACH SVHC="No SVHC", RoHS=Yes, RoHS Compliant=Yes, Series=CC, Stock 1=10000, Supplier 1="Future Electronics", Terminal Length=0.225mm, Termination=SMD/SMT, Thickness=0.022inch, Voltage Rating (DC)=16V, Width=0.02inch
FB1 FB2 FB3 FB4 FB5 FB6 FB7 FB8: library part "FB 68R 400mA 310mR 0402", "Ferrite Beads Multi-Layer 68Ohm 25% 100MHz 400mA 310mOhm DCR 0402 T/R", Case Code (Imperial)=0402, Case Code (Metric)=1005, DC Resistance (DCR)=310mR, Frequency=100MHz, Manufacturer="Taiyo Yuden", Manufacturer Part Number=BK1005LL680-T, Max Current Rating=400mA, Max Operating Temperature=125°C, Min Operating Temperature=-55°C, Package Quantity=1, Supplier Part Number 1=587-1860-1-ND, Tolerance=25%, Case/Package=0402, Category="Ferrite Beads and Chips", ComponentLink1Description=https://datasheet.ciiva.com/1013/bk1005ll680-t-ss-1013936.pdf?src-supplier=Digi-Key, ComponentLink1URL=https://datasheet.ciiva.com/1013/bk1005ll680-t-ss-1013936.pdf?src-supplier=Digi-Key, ComponentLink2Description=https://datasheet.ciiva.com/1013/mlci07-e-1013935.pdf?src-supplier=Digi-Key, ComponentLink2URL=https://datasheet.ciiva.com/1013/mlci07-e-1013935.pdf?src-supplier=Digi-Key, ComponentLink3Description=https://datasheet.ciiva.com/1013/mlci07-e-1013937.pdf?src-supplier=Digi-Key, ComponentLink3URL=https://datasheet.ciiva.com/1013/mlci07-e-1013937.pdf?src-supplier=Digi-Key, Core Material=Ferrite, Depth=0.55mm, Halogen Free="Halogen Free", Height=0.022inch, Impedance=68R, Lead Free="Lead Free", Length=0.039inch, Max DC Current=400mA, Mount="Surface Mount", Number of Lines=1, Number of Pins=2, Packaging="Tape and Reel", Pricing 1="1=0.10000, 10=0.04100, 25=0.03640, 50=0.03300, 100=0.02970, 250=0.02176, 500=0.01584, 1000=0.01551, 5000=0.01056 (USD)", REACH SVHC=Unknown, RoHS=Yes, Series=BK, Shielding=Unshielded, Stock 1=9707, Supplier 1=Digi-Key, Termination=SMD/SMT, Test Frequency=100MHz, Width=0.02inch
J1 J7: library part "CONN HDR 08 MALE RA 2 ROW", "SMT Angled Pin Header WR-PHD, Pitch 2.54 mm, Dual Row, 8 pins", Color=Black, Current Rating=3A, Flammability Rating="UL94 V-0", Manufacturer="Wurth Electronics", Supplier Part Number 1=72Y1215, Voltage Rating=250V, Category=Connectors, ComponentLink1Description=http://www.farnell.com/cad/1889791.pdf?src-supplier=Element14, ComponentLink1URL=http://www.farnell.com/cad/1889791.pdf?src-supplier=Element14, ComponentLink2Description=https://katalog.we-online.de/em/datasheet/6101xx249121.pdf?src-supplier=Digi-Key, ComponentLink2URL=https://katalog.we-online.de/em/datasheet/6101xx249121.pdf?src-supplier=Digi-Key, ComponentLink3Description=https://www.distrelec.bizhttp://katalog.we-online.de/em/datasheet/6101xx249121.pdf?mime=application%2Fpdf&src-supplier=Distrelec, ComponentLink3URL=https://www.distrelec.bizhttp://katalog.we-online.de/em/datasheet/6101xx249121.pdf?mime=application%2Fpdf&src-supplier=Distrelec, Connector Type=Header, Contact Finish - Mating=GOLD, Contact Material="Copper Alloy", Contact Mating Length=0.236inch, Contact Plating=Gold, Contact Shape=Square, Contact Type="Male Pin", Fastening Type=Pull, Gender=Male, Insulation Color=Black, Insulation Material=Nylon, Manufacturer Part Number=610108249121, Mount="Surface Mount", Number of Contacts=8, Number of Pins=8, Number of Positions=8, Number of Rows=2, Packaging="Cut Tape", Pitch=0.1inch, Pricing 1="1=1.53000, 10=1.52000, 25=1.49000, 50=1.46000, 100=1.36000 (USD)", RoHS=Yes, RoHS Compliant=Yes, Row Spacing=0.1inch, Series=WR-PHD, Stock 1=350, Supplier 1=Newark, Termination=Solder
J2 J6: library part "CONN HDR 08 FEMALE RA 2 ROW", "Conn Socket Strip RCP 8 POS 2mm Solder RA SMD T/R", Current Rating=2A, Flammability Rating="UL94 V-0", Insulation Color=Black, Manufacturer=Harwin, Max Operating Temperature=105°C, Min Operating Temperature=-40°C, Supplier Part Number 1=45AJ6425, Category=Connectors, ComponentLink1Description=https://cdn.harwin.com/pdfs/M22-655R.pdf?src-supplier=Digi-Key, ComponentLink1URL=https://cdn.harwin.com/pdfs/M22-655R.pdf?src-supplier=Digi-Key, Connector Type=Receptacle,Forked, Contact Material=Bronze, Contact Plating=Gold, Contact Shape=Square, Fastening Type=Push,Pull, Insulation Material=Polymer, Manufacturer Part Number=M22-6550442R, Mount="Surface Mount", Number of Positions=8, Number of Rows=2, Packaging="Cut Tape", Pricing 1="1=1.17000, 100=0.91900, 250=0.84000, 500=0.76600, 1000=0.71200 (USD)", RoHS=Yes, RoHS Compliant=Yes, Stock 1=750, Supplier 1=Newark, Termination=Solder
J3 J4 J5: library part "CON SMA BORE TH HJ-SMA058"
M1 M2 M3 M4: library part "MECH M2.0 UNPLATED"
Q1: library part "TRANS NJFET 25V SOT23-3 MMBFJ309LT1G", "Transistor; JFET - VHF/UHF Amplifier; 25 VDC; 10 mADC; SOT-23 (TO-236); Pb-Free", Breakdown Voltage=-25V, Case/Package=SOT-23-3, Continuous Drain Current (ID)=10mA, Drain to Source Voltage (Vdss)=25V, Input Capacitance=5pF, Manufacturer 1="ON Semiconductor", Max Operating Temperature=150°C, Min Operating Temperature=-55°C, Package Quantity=3000, Power Dissipation=225mW, Supplier Part Number 1=4084901, Category 1=JFETs, ComponentLink1Description=https://datasheet.ciiva.com/1187/mmbfj309lt1-d-1187696.pdf?src-supplier=Element14, ComponentLink1URL=https://datasheet.ciiva.com/1187/mmbfj309lt1-d-1187696.pdf?src-supplier=Element14, ComponentLink2Description=https://datasheet.ciiva.com/6362/mmbfj309lt1-d-6362849.pdf?src-supplier=Digi-Key, ComponentLink2URL=https://datasheet.ciiva.com/6362/mmbfj309lt1-d-6362849.pdf?src-supplier=Digi-Key, ComponentLink3Description=https://datasheet.ciiva.com/30480/0900766b811a6593-30480155.pdf?src-supplier=Rs, ComponentLink3URL=https://datasheet.ciiva.com/30480/0900766b811a6593-30480155.pdf?src-supplier=Rs, ComponentLink4Description=https://datasheet.ciiva.com/8084/mmbfj309lt1-d-8084199.pdf?src-supplier=Avnet, ComponentLink4URL=https://datasheet.ciiva.com/8084/mmbfj309lt1-d-8084199.pdf?src-supplier=Avnet, ComponentLink5Description=https://datasheet.ciiva.com/16376/mmbfj309lt1-d-16376405.pdf?src-supplier=Future+Electronics, ComponentLink5URL=https://datasheet.ciiva.com/16376/mmbfj309lt1-d-16376405.pdf?src-supplier=Future+Electronics, ComponentLink6Description=https://datasheet.ciiva.com/6362/mmbfj309lt1-d-6362854.pdf?src-supplier=Digi-Key, ComponentLink6URL=https://datasheet.ciiva.com/6362/mmbfj309lt1-d-6362854.pdf?src-supplier=Digi-Key, ComponentLink7Description=https://datasheet.ciiva.com/1187/mmbfj309lt1-d-1187695.pdf?src-supplier=Element14, ComponentLink7URL=https://datasheet.ciiva.com/1187/mmbfj309lt1-d-1187695.pdf?src-supplier=Element14, Description 1="Transistor; JFET - VHF/UHF Amplifier; 25 VDC; 10 mADC; SOT-23 (TO-236); Pb-Free", Gate to Source Voltage (Vgs)=25V, Halogen Free="Halogen Free", Height=0.04inch, Lead Free="Lead Free", Length=0.119inch, Manufacturer Part Number 1=MMBFJ309LT1G, Packaging="Tape and Reel", Pins=3, Polarity=N-CHANNEL, Polarization=N, Pricing 1="3000=0.0952, 9000=0.0915, 12000=0.0905, 30000=0.0876, 45000=0.0847 (USD)", Radiation Hardening=No, Reach SVHC Compliant=No, RoHS 1=Yes, RoHS Compliant=Yes, Series=-, Stock 1=12000, Supplier 1="Future Electronics", Voltage Rating=25V, Voltage Rating (DC)=-25V, Weight=0.050717oz, Width=0.055inch
R1 R3 R5 R6: library part "RES 100R 63mW 1% 0402", "Res General Purpose Thick Film 0402 100 Ohm 1% 1/16W ±100ppm/°C Molded SMD Paper T/R", Case Code (Imperial)=0402, Case Code (Metric)=1005, Manufacturer=Yageo, Manufacturer Part Number=RC0402FR-07100RL, Max Operating Temperature=155°C, Max Power Dissipation=63mW, Min Operating Temperature=-55°C, Power Rating=62.5mW, Resistance Tolerance=1%, Resistor Type="Thick Film", Supplier Part Number 1=45Y6897, Temperature Coefficient=100ppm/°C, Voltage Rating=50V, Case/Package=0402, Category="Chip SMD Resistors", ComponentLink1Description=https://datasheet.ciiva.com/11808/0900766b80c66297-11808765.pdf?src-supplier=RSComponents, ComponentLink1URL=https://datasheet.ciiva.com/11808/0900766b80c66297-11808765.pdf?src-supplier=RSComponents, ComponentLink2Description=https://datasheet.ciiva.com/7849/1784430-7849810.pdf?src-supplier=Element14, ComponentLink2URL=https://datasheet.ciiva.com/7849/1784430-7849810.pdf?src-supplier=Element14, ComponentLink3Description=https://datasheet.ciiva.com/28367/1018594-28367226.pdf?src-supplier=Element14, ComponentLink3URL=https://datasheet.ciiva.com/28367/1018594-28367226.pdf?src-supplier=Element14, ComponentLink4Description=https://datasheet.ciiva.com/22747/1018594-22747511.pdf?src-supplier=Element14, ComponentLink4URL=https://datasheet.ciiva.com/22747/1018594-22747511.pdf?src-supplier=Element14, ComponentLink5Description=https://datasheet.ciiva.com/12667/pyu-rc0402-51-rohs-l-6-r-12667957.pdf?src-supplier=Mouser, ComponentLink5URL=https://datasheet.ciiva.com/12667/pyu-rc0402-51-rohs-l-6-r-12667957.pdf?src-supplier=Mouser, ComponentLink6Description=https://datasheet.ciiva.com/15189/getdatasheetpartid-329466-15189335.pdf?src-supplier=Verical, ComponentLink6URL=https://datasheet.ciiva.com/15189/getdatasheetpartid-329466-15189335.pdf?src-supplier=Verical, ComponentLink7Description=https://datasheet.ciiva.com/16740/pyu-rc0402-51-rohs-l-6-r-16740566.pdf?src-supplier=Future+Electronics, ComponentLink7URL=https://datasheet.ciiva.com/16740/pyu-rc0402-51-rohs-l-6-r-16740566.pdf?src-supplier=Future+Electronics, Construction=Rectangular, Depth=0.5mm, Features="Moisture Resistant", Height=0.32mm, Lead Free="Lead Free", Length=1mm, Military Standard=Not, Number of Pins=2, Number of Terminations=2, Packaging="Tape and Reel", Pricing 1="1=0.00100, 10000=0.00100 (USD)", Reach SVHC Compliant=Yes, Resistance=100R, RoHS=Yes, RoHS Compliant=Yes, Series=RC, Size Code=0402, Stock 1=4390000, Supplier 1=Newark, Technology="THICK FILM", Termination=SMD/SMT, Tolerance=1%, Voltage Rating (DC)=50V, Width=0.5mm
R2: library part "RES 200R 1% 63mW 0402", "SMD Chip Resistor, 200 Ohm, ± 1%, 63 mW, 0402 [1005 Metric], Thick Film, General Purpose", Case Code (Imperial)=0402, Case Code (Metric)=1005, Manufacturer 1=Yageo, Manufacturer Part Number 1=RC0402FR-07200RL, Max Operating Temperature=155°C, Max Power Dissipation=63mW, Min Operating Temperature=-55°C, Package Quantity=1, Resistance Tolerance=1%, Resistor Type="Thick Film", Supplier Part Number 1=5740899, Temperature Coefficient=100ppm/°C, Voltage Rating=50V, Case/Package=0402, Category 1="Chip SMD Resistors", ComponentLink1Description=https://datasheet.ciiva.com/7849/1018594-7849899.pdf?src-supplier=Element14, ComponentLink1URL=https://datasheet.ciiva.com/7849/1018594-7849899.pdf?src-supplier=Element14, ComponentLink2Description=https://datasheet.ciiva.com/7849/1018594-7849898.pdf?src-supplier=Element14, ComponentLink2URL=https://datasheet.ciiva.com/7849/1018594-7849898.pdf?src-supplier=Element14, ComponentLink3Description=https://datasheet.ciiva.com/7983/1018594-7983509.pdf?src-supplier=Element14, ComponentLink3URL=https://datasheet.ciiva.com/7983/1018594-7983509.pdf?src-supplier=Element14, ComponentLink4Description=https://datasheet.ciiva.com/2553/pyu-r-int-thick-7-2553231.pdf?src-supplier=Digi-Key, ComponentLink4URL=https://datasheet.ciiva.com/2553/pyu-r-int-thick-7-2553231.pdf?src-supplier=Digi-Key, ComponentLink5Description=https://datasheet.ciiva.com/2553/pyu-r-int-thick-7-2553232.pdf?src-supplier=Digi-Key, ComponentLink5URL=https://datasheet.ciiva.com/2553/pyu-r-int-thick-7-2553232.pdf?src-supplier=Digi-Key, ComponentLink6Description=https://datasheet.ciiva.com/2553/pyu-r-int-thick-7-2553230.pdf?src-supplier=Digi-Key, ComponentLink6URL=https://datasheet.ciiva.com/2553/pyu-r-int-thick-7-2553230.pdf?src-supplier=Digi-Key, ComponentLink7Description=https://datasheet.ciiva.com/5562/pyu-rc0402-51-rohs-l-6-r-8721-5562539.pdf?src-supplier=Mouser, ComponentLink7URL=https://datasheet.ciiva.com/5562/pyu-rc0402-51-rohs-l-6-r-8721-5562539.pdf?src-supplier=Mouser, ComponentLink8Description=https://datasheet.ciiva.com/16804/pyu-rc0402-51-rohs-l-6-r-16804406.pdf?src-supplier=Future+Electronics, ComponentLink8URL=https://datasheet.ciiva.com/16804/pyu-rc0402-51-rohs-l-6-r-16804406.pdf?src-supplier=Future+Electronics, ComponentLink9Description=https://datasheet.ciiva.com/15189/getdatasheetpartid-331152-15189383.pdf?src-supplier=Verical, ComponentLink9URL=https://datasheet.ciiva.com/15189/getdatasheetpartid-331152-15189383.pdf?src-supplier=Verical, Construction=Rectangular, Depth=0.5mm, Description 1="SMD Chip Resistor, 200 Ohm, ± 1%, 63 mW, 0402 [1005 Metric], Thick Film, General Purpose", Features="Moisture Resistant", Height=0.016inch, Lead Free="Lead Free", Length=1mm, Military Standard=Not, Number of Terminations=2, Packaging="Tape and Reel", Power Rating=63mW, Pricing 1="10000=0.0012, 50000=0.0011, 300000=0.0011, 1000000=0.001, 3000000=0.0009 (USD)", Reach SVHC Compliant=No, RoHS 1=Yes, RoHS Compliant=Yes, Series=RC, Stock 1=4960000, Supplier 1="Future Electronics", Termination=SMD/SMT, Tolerance=1%, Voltage Rating (DC)=50V, Width=0.02inch
R4: library part "RES 1M00 1% 63mW 0402", "贴片电阻 1000000Ω ± 1.00% 0.0625W ± 100ppm/℃ 0402", Case Code (Imperial)=0402, Case Code (Metric)=1005, Manufacturer=Yageo, Manufacturer Part Number=RC0402FR-071ML, Max Operating Temperature=155°C, Max Power Dissipation=63mW, Min Operating Temperature=-55°C, Resistance=1MR, Resistance Tolerance=1%, Resistor Type="Thick Film", Supplier Part Number 1=6186194, Temperature Coefficient=100ppm/°C, Voltage Rating=50V, Case/Package=0402, Category="Chip SMD Resistors", ComponentLink1Description=https://datasheet.ciiva.com/11808/0900766b80c66297-11808125.pdf?src-supplier=RSComponents, ComponentLink1URL=https://datasheet.ciiva.com/11808/0900766b80c66297-11808125.pdf?src-supplier=RSComponents, ComponentLink2Description=https://datasheet.ciiva.com/46394/1018594-46394951.pdf?src-supplier=Element14, ComponentLink2URL=https://datasheet.ciiva.com/46394/1018594-46394951.pdf?src-supplier=Element14, ComponentLink3Description=https://datasheet.ciiva.com/7849/1018594-7849883.pdf?src-supplier=Element14, ComponentLink3URL=https://datasheet.ciiva.com/7849/1018594-7849883.pdf?src-supplier=Element14, ComponentLink4Description=https://datasheet.ciiva.com/7849/1018594-7849882.pdf?src-supplier=Element14, ComponentLink4URL=https://datasheet.ciiva.com/7849/1018594-7849882.pdf?src-supplier=Element14, ComponentLink5Description=https://datasheet.ciiva.com/16741/pyu-rc0402-51-rohs-l-6-r-16741081.pdf?src-supplier=Future+Electronics, ComponentLink5URL=https://datasheet.ciiva.com/16741/pyu-rc0402-51-rohs-l-6-r-16741081.pdf?src-supplier=Future+Electronics, Construction=Rectangular, Depth=0.5mm, Features="Moisture Resistant", Height=0.32mm, Lead Free="Lead Free", Length=1mm, Military Standard=Not, Number of Terminations=2, Packaging="Tape and Reel", Power Rating=63mW, Pricing 1="10000=0.00100 (USD)", REACH SVHC=Unknown, RoHS=Yes, RoHS Compliant=Yes, Series=RC, Size Code=0402, Stock 1=110000, Supplier 1=RSComponents, Technology="THICK FILM", Termination=SMD/SMT, Tolerance=1%
R7 R10 R11: library part "RES 1k00 63mW 0402", "1 kOhms ¡À1% 0.063W, 1/16W Chip Resistor 0402 (1005 Metric) Moisture Resistant Thick Film", Case Code (Imperial)=0402, Case Code (Metric)=1005, Manufacturer=Yageo, Manufacturer Part Number=RC0402FR-071KL, Max Operating Temperature=155°C, Max Power Dissipation=63mW, Min Operating Temperature=-55°C, Power Rating=62.5mW, Resistance=1kR, Resistance Tolerance=1%, Resistor Type="Thick Film", Supplier Part Number 1=48Y4534, Temperature Coefficient=100ppm/°C, Voltage Rating=50V, Case/Package=0402, Category="Chip SMD Resistors", ComponentLink1Description=https://datasheet.ciiva.com/11819/0900766b80c66297-11819477.pdf?src-supplier=RSComponents, ComponentLink1URL=https://datasheet.ciiva.com/11819/0900766b80c66297-11819477.pdf?src-supplier=RSComponents, ComponentLink2Description=https://datasheet.ciiva.com/7983/1018594-7983502.pdf?src-supplier=Element14, ComponentLink2URL=https://datasheet.ciiva.com/7983/1018594-7983502.pdf?src-supplier=Element14, ComponentLink3Description=https://datasheet.ciiva.com/22747/1018594-22747513.pdf?src-supplier=Element14, ComponentLink3URL=https://datasheet.ciiva.com/22747/1018594-22747513.pdf?src-supplier=Element14, ComponentLink4Description=https://datasheet.ciiva.com/12666/pyu-rc0402-51-rohs-l-6-r-12666741.pdf?src-supplier=Mouser, ComponentLink4URL=https://datasheet.ciiva.com/12666/pyu-rc0402-51-rohs-l-6-r-12666741.pdf?src-supplier=Mouser, ComponentLink5Description=https://datasheet.ciiva.com/7849/1018594-7849869.pdf?src-supplier=Element14, ComponentLink5URL=https://datasheet.ciiva.com/7849/1018594-7849869.pdf?src-supplier=Element14, ComponentLink6Description=https://datasheet.ciiva.com/7849/1018594-7849871.pdf?src-supplier=Element14, ComponentLink6URL=https://datasheet.ciiva.com/7849/1018594-7849871.pdf?src-supplier=Element14, ComponentLink7Description=https://datasheet.ciiva.com/17063/pyu-rc0402-51-rohs-l-6-r-17063193.pdf?src-supplier=Future+Electronics, ComponentLink7URL=https://datasheet.ciiva.com/17063/pyu-rc0402-51-rohs-l-6-r-17063193.pdf?src-supplier=Future+Electronics, Construction=Rectangular, Depth=0.5mm, Features="Moisture Resistant", Height=0.32mm, Lead Free="Lead Free", Length=1mm, Military Standard=Not, Number of Pins=2, Number of Terminations=2, Packaging="Tape and Reel", Pricing 1="1=0.00100, 10000=0.00100 (USD)", Reach SVHC Compliant=Yes, RoHS=Yes, RoHS Compliant=Yes, Series=RC, Size Code=0402, Stock 1=3520000, Supplier 1=Newark, Technology="THICK FILM", Termination=SMD/SMT, Tolerance=1%, Voltage Rating (DC)=50V, Width=0.5mm